# EAGLE board SyncScan Standalone MK3 PTH (EAGLE 6.2)
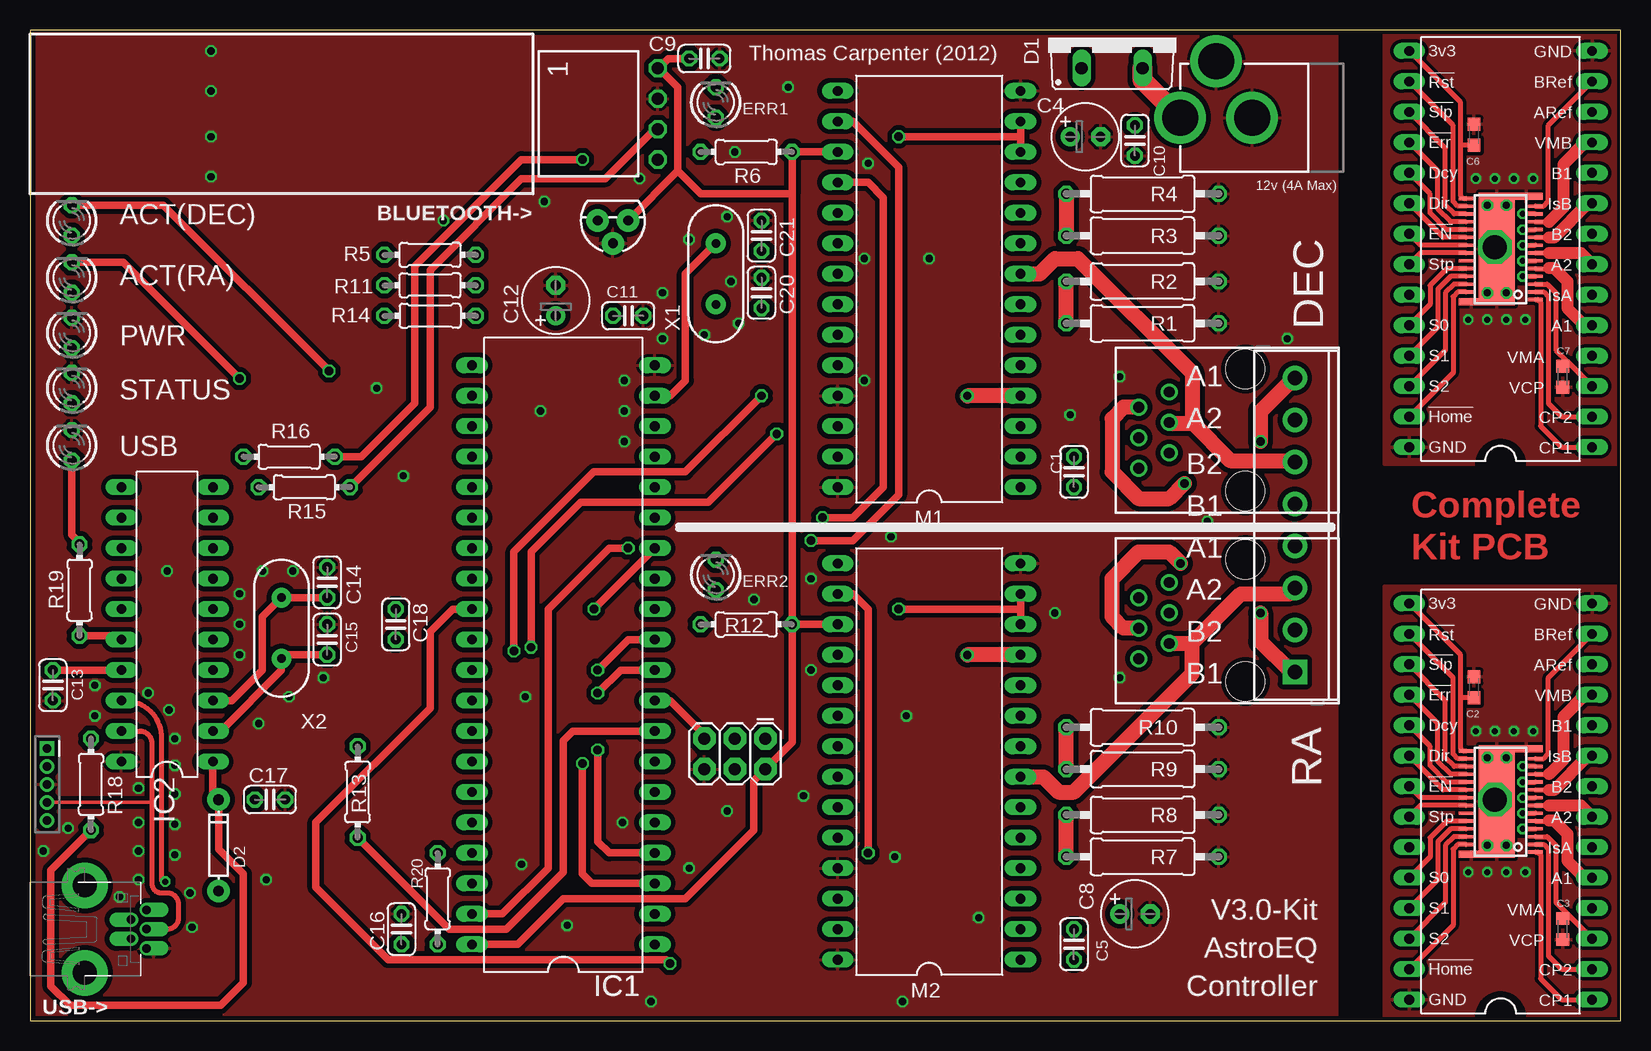
[diagram p0: board, top side]
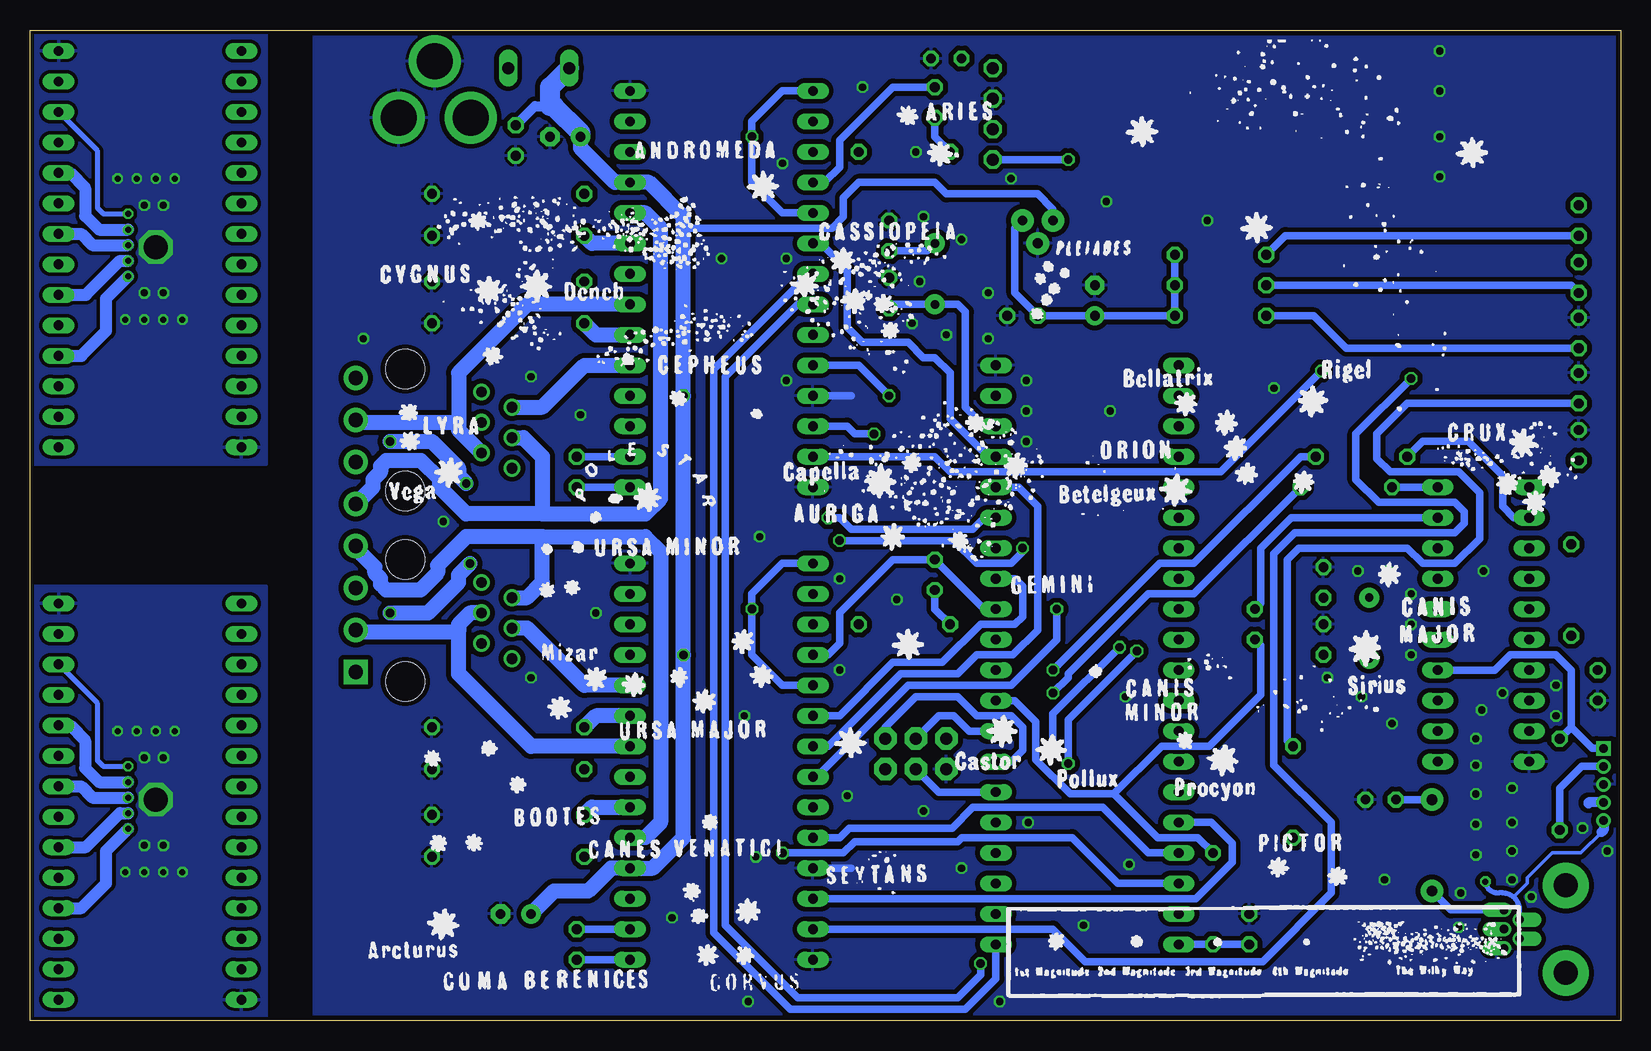
[diagram p1: board, bottom side, seen from below]

Size 132.56 x 82.55 mm. Coordinates in mm from the lower left corner, seen from the top.
Outline: 0,82.55 0,0 132.56,0 132.56,82.55 0,82.55
Copper layers (1*16): Top 0.035mm / dielectric 1.5mm / Bottom 0.035mm
Design rules: minimum track width 0.2mm, minimum drill 0.49mm, track to track 0.2mm, track to pad 0.2mm, pad to pad 0.2mm, via to via 0.2mm, smd to smd 0mil, copper to edge 10mil, drill to drill 0.2mm, minimum pad ring 10mil, minimum via ring 7mil, stop-mask expansion 0.125mm, vias tented up to drill 0mil, thermal gap 10mil
Net classes: 1 power: width 0.61 mm, drill 0.711 mm, clearance 0.203 mm; 2 gnd: width 0.305 mm, drill 0.711 mm, clearance 0.203 mm; 3 usbvcc: width 0.508 mm, drill 0.711 mm, clearance 0.203 mm
tRestrict: area 120.9,0.3 to 124.2,2; area 120.9,46.4 to 124.2,48

## Footprints (pad centres in the part's own frame; a part is rotated, then mirrored left to right if it is on the bottom)
LED3MM = drill 0.813 octagon: A -1.27,0; K 1.27,0
SSW-104-02-S-S-RA = drill 1 pad 1.5 octagon: 1 -3.81,1.524; 2 -1.27,1.524; 3 1.27,1.524; 4 3.81,1.524
C025-024X044 = drill 0.813 octagon: 1 -1.27,0; 2 1.27,0
C0603K = smd 1.05 x 1.08: 1 -0.875,0; 2 0.875,0
E2,5-6 = drill 0.813 pad 1.6: + -1.27,0 | drill 0.813 pad 1.6 octagon: - 1.27,0
TO220ACS = drill 1.016 long: A 2.54,-2.54; C -2.54,-2.54
DIODE-1N4148 = drill 0.9 pad 1.88: A -3.81,0; C 3.81,0
RJ11-NO_SHIELD = drill 0.9 pad 1.4: 1 -3.175,8.89; 2 -1.905,6.35; 3 -0.635,8.89; 4 0.635,6.35; 5 1.905,8.89; 6 3.175,6.35 | hole 3.251: -5.08,0; 5.08,0
DIL40 = drill 0.813 long: 1 -24.13,-7.62; 2 -21.59,-7.62; 3 -19.05,-7.62; 4 -16.51,-7.62; 5 -13.97,-7.62; 6 -11.43,-7.62; 7 -8.89,-7.62; 8 -6.35,-7.62; 9 -3.81,-7.62; 10 -1.27,-7.62; 11 1.27,-7.62; 12 3.81,-7.62; 13 6.35,-7.62; 14 8.89,-7.62; 15 11.43,-7.62; 16 13.97,-7.62; 17 16.51,-7.62; 18 19.05,-7.62; 19 21.59,-7.62; 20 24.13,-7.62; 21 24.13,7.62; 22 21.59,7.62; 23 19.05,7.62; 24 16.51,7.62; 25 13.97,7.62; 26 11.43,7.62; 27 8.89,7.62; 28 6.35,7.62; 29 3.81,7.62; 30 1.27,7.62; 31 -1.27,7.62; 32 -3.81,7.62; 33 -6.35,7.62; 34 -8.89,7.62; 35 -11.43,7.62; 36 -13.97,7.62; 37 -16.51,7.62; 38 -19.05,7.62; 39 -21.59,7.62; 40 -24.13,7.62
DIL20 = drill 0.813 long: 1 -3.81,11.43; 2 -3.81,8.89; 3 -3.81,6.35; 4 -3.81,3.81; 5 -3.81,1.27; 6 -3.81,-1.27; 7 -3.81,-3.81; 8 -3.81,-6.35; 9 -3.81,-8.89; 10 -3.81,-11.43; 11 3.81,-11.43; 12 3.81,-8.89; 13 3.81,-6.35; 14 3.81,-3.81; 15 3.81,-1.27; 16 3.81,1.27; 17 3.81,3.81; 18 3.81,6.35; 19 3.81,8.89; 20 3.81,11.43
TO-92 = drill 0.813 pad 1.88: 1 -1.27,0; 2 0,1.905; 3 1.27,0
DIL28-6 = drill 0.813 long: 1 -16.51,-7.62; 2 -13.97,-7.62; 3 -11.43,-7.62; 4 -8.89,-7.62; 5 -6.35,-7.62; 6 -3.81,-7.62; 7 -1.27,-7.62; 8 1.27,-7.62; 9 3.81,-7.62; 10 6.35,-7.62; 11 8.89,-7.62; 12 11.43,-7.62; 13 13.97,-7.62; 14 16.51,-7.62; 15 16.51,7.62; 16 13.97,7.62; 17 11.43,7.62; 18 8.89,7.62; 19 6.35,7.62; 20 3.81,7.62; 21 1.27,7.62; 22 -1.27,7.62; 23 -3.81,7.62; 24 -6.35,7.62; 25 -8.89,7.62; 26 -11.43,7.62; 27 -13.97,7.62; 28 -16.51,7.62
PIC-ICSP-MINI = drill 0.7 square: 1 -3,0 | drill 0.7: 2 -1.5,0; 3 0,0; 4 1.5,0; 5 3,0
POWER_JACK_PTH = drill 2.997 pad 4.318: GND 0,7.7; GNDBREAK 4.7,10.7; PWR 0,13.7
DIL28-6' = drill 0.813 pad 1.2 long: 1 -16.51,-7.62; 2 -13.97,-7.62; 3 -11.43,-7.62; 4 -8.89,-7.62; 5 -6.35,-7.62; 6 -3.81,-7.62; 7 -1.27,-7.62; 8 1.27,-7.62; 9 3.81,-7.62; 10 6.35,-7.62; 11 8.89,-7.62; 12 11.43,-7.62; 13 13.97,-7.62; 14 16.51,-7.62; 15 16.51,7.62; 16 13.97,7.62; 17 11.43,7.62; 18 8.89,7.62; 19 6.35,7.62; 20 3.81,7.62; 21 1.27,7.62; 22 -1.27,7.62; 23 -3.81,7.62; 24 -6.35,7.62; 25 -8.89,7.62; 26 -11.43,7.62; 27 -13.97,7.62; 28 -16.51,7.62
HTSSOP28PWP = smd 0.27 x 1.2: 1 -4.21,-2.9; 2 -3.575,-2.9; 3 -2.925,-2.9; 4 -2.275,-2.9; 5 -1.625,-2.9; 6 -0.975,-2.9; 7 -0.325,-2.9; 8 0.325,-2.9; 9 0.975,-2.9; 10 1.625,-2.9; 11 2.275,-2.9; 12 2.925,-2.9; 13 3.575,-2.9; 15 4.21,2.9; 16 3.575,2.9; 17 2.925,2.9; 18 2.275,2.9; 19 1.625,2.9; 20 0.975,2.9; 21 0.325,2.9; 22 -0.325,2.9; 23 -0.975,2.9; 24 -1.625,2.9; 25 -2.275,2.9; 26 -2.925,2.9; 27 -3.575,2.9 | smd 0.61 x 2.735: 14 4.395,-2.132 | smd 0.61 x 2.1: 28 -4.395,2.45 | smd 9.4 x 3: EXP 0,0.318
SCREWTERMINAL-3.5MM-8 = drill 1.2 pad 2.032 square: 1 0,0 | drill 1.2 pad 2.032: 2 3.5,0; 3 7,0; 4 10.5,0; 5 14,0; 6 17.5,0; 7 21,0; 8 24.5,0
2X3 = drill 1.016 pad 1.88 octagon: 1 0,0; 2 0,2.54; 3 2.54,0; 4 2.54,2.54; 5 5.08,0; 6 5.08,2.54
0309/12 = drill 0.813 octagon: 1 -6.35,0; 2 6.35,0
0204/7 = drill 0.813 octagon: 1 -3.81,0; 2 3.81,0
USB-MINIB-THM-MOLEX = drill 0.7 offset: D+ 0,9.72; D- -0.8,8.42; GND 1.6,9.72; ID 0.8,8.42; VBUS -1.6,9.72 | drill 2 pad 3.81: GND1 -3.65,4.57; GND4 3.65,4.57
HC49US = drill 0.7 pad 1.651: 1 -2.54,0; 2 2.54,0

## Placement (x,y rotation side)
ACT(DEC)  Green  [LED3MM]  3.49,66.67 90 top
ACT(RA)  Green  [LED3MM]  3.49,61.91 90 top
BLUETOOTH->  http://www.ebay.co.uk/itm/250991624201  [SSW-104-02-S-S-RA]  50.8,75.56 270 top
C1  10n  [C025-024X044]  87,45.72 90 top
C2  100n  [C0603K]  120.33,27.78 90 top
C3  100n  [C0603K]  127.71,7.62 90 top
C4  100u  [E2,5-6]  87.95,73.66 0 top
C5  10n  [C025-024X044]  87,6.35 90 top
C6  100n  [C0603K]  120.33,73.82 90 top
C7  100n  [C0603K]  127.71,53.66 90 top
C8  100u  [E2,5-6]  92.08,8.89 0 top
C9  100n  [C025-024X044]  56.2,80.17 0 top
C10  100n  [C025-024X044]  92.08,73.34 270 top
C11  100n  [C025-024X044]  49.85,58.74 0 top
C12  100u  [E2,5-6]  43.81,60.01 90 top
C13  470n  [C025-024X044]  1.91,27.94 90 top
C14  22p  [C025-024X044]  24.77,36.51 90 top
C15  22p  [C025-024X044]  24.77,31.75 90 top
C16  100n  [C025-024X044]  30.96,7.62 90 top
C17  100n  [C025-024X044]  20,18.41 0 top
C18  100n  [C025-024X044]  30.48,33.02 270 top
C20  22p  [C025-024X044]  60.96,60.64 90 top
C21  22p  [C025-024X044]  60.96,65.41 90 top
D1  C3D06065A  [TO220ACS]  90.17,81.92 0 top
D2  1N4148  [DIODE-1N4148]  15.72,14.61 90 top
DEC  RJ11-4X  [RJ11-NO_SHIELD]  101.28,49.21 90 top
ERR1  Red  [LED3MM]  57.15,76.52 90 top
ERR2  Red  [LED3MM]  57.15,37.15 90 top
IC1  ATMEGA162-16PU  [DIL40]  44.45,30.48 90 top
IC2  PIC18F14K50-I/P  [DIL20]  11.43,33.02 180 top
IC3  78L05  [TO-92]  48.58,66.67 180 top
IC4  Footprint  [DIL28-6]  122.56,18.26 90 top
IC5  Footprint  [DIL28-6]  122.56,64.29 90 top
ICSP  PIC-ICSP-MINI  [PIC-ICSP-MINI]  1.43,19.68 270 top
J1  POWER_JACKPTH  [POWER_JACK_PTH]  109.54,75.25 90 top
M1  DRV8824BREAKOUT  [DIL28-6']  74.93,60.96 90 top
M1A  DRV8824PWP  [HTSSOP28PWP]  122.56,64.29 90 top
M2  DRV8824BREAKOUT  [DIL28-6']  74.93,21.59 90 top
M2A  DRV8824PWP  [HTSSOP28PWP]  122.56,18.26 90 top
MOTOR2  Screw Terminal  [SCREWTERMINAL-3.5MM-8]  105.41,29.05 90 top
PROG  AVR_PRG  [2X3]  61.28,23.5 180 top
PWR  Red  [LED3MM]  3.49,57.31 90 top
R1  1.5R  [0309/12]  92.71,58.1 180 top
R2  1.5R  [0309/12]  92.71,61.59 180 top
R3  1.5R  [0309/12]  92.71,65.41 180 top
R4  1.5R  [0309/12]  92.71,68.9 180 top
R5  1k  [0204/7]  33.34,63.82 0 top
R6  1k  [0204/7]  59.69,72.39 0 top
R7  1.5R  [0309/12]  92.71,13.65 180 top
R8  1.5R  [0309/12]  92.71,17.14 180 top
R9  1.5R  [0309/12]  92.71,20.95 180 top
R10  1.5R  [0309/12]  92.71,24.45 180 top
R11  1k  [0204/7]  33.34,61.28 0 top
R12  1k  [0204/7]  59.69,33.02 0 top
R13  1k  [0204/7]  27.3,19.05 90 top
R14  1k  [0204/7]  33.34,58.74 180 top
R15  1k  [0204/7]  22.86,44.45 180 top
R16  1k  [0204/7]  21.59,46.99 180 top
R18  10k  [0204/7]  5.08,19.68 270 top
R19  1k  [0204/7]  4.13,35.88 270 top
R20  10k  [0204/7]  33.97,10.16 270 top
RA  RJ11-4X  [RJ11-NO_SHIELD]  101.28,33.34 90 top
STATUS  Green  [LED3MM]  3.49,52.7 90 top
USB  Green  [LED3MM]  3.49,47.94 90 top
USB->  Molex 565790519  [USB-MINIB-THM-MOLEX]  0,7.62 270 top
X1  16MHz  [HC49US]  57.15,62.23 90 top
X2  12MHz  [HC49US]  20.95,32.7 90 top

## Library data of the parts
ACT(DEC) ACT(RA) STATUS USB = led; MF: KINGBRIGHT; MPN: L-424GDT; OC_FARNELL: 1142496
BLUETOOTH-> = con-samtec; OC_FARNELL: unknown; OC_NEWARK: 11P9385
C1 C5 = resistor; MF: AVX; MPN: SR151C103KAR; OC_FARNELL: 1100380
C2 C3 C6 C7 = resistor; MF: KEMET; MPN: C0603C104K4RACTU; OC_FARNELL: 1414610
C4 C8 C12 = resistor; MF: MULTICOMP; MPN: MCGPR25V107M6.3X11; OC_FARNELL: 9451188
C9-C11 C16-C18 = resistor; MF: AVX; MPN: SR205C104KAR; OC_FARNELL: 1100367
C13 = rcl; MF: KEMET; MPN: C320C474M5U5TA; OC_FARNELL: 1457660
C14 C15 C20 C21 = rcl; MF: AVX; MPN: SR151A220JAR; OC_FARNELL: 1100369
D1 = diode; MF: CREE; MPN: C3D06065A; OC_FARNELL: 1864928
D2 = SparkFun; MF: MULTICOMP; MPN: 1N4148.; OC_FARNELL: 9565124
DEC RA = con-tycoelectronics; MF: MH CONNECTORS; MPN: MHRJJ64NFRA; OC_FARNELL: 3938347; OC_NEWARK: 19R7022
ERR1 ERR2 PWR = led; MF: KINGBRIGHT; MPN: L-424HDT; OC_FARNELL: 1142499
IC1 = atmel; MF: ATMEL; MPN: ATMEGA162-16PU; OC_FARNELL: 9171169
IC2 = microchip; MF: MICROCHIP; MPN: PIC18F14K50-I/P; OC_FARNELL: 1648501; OC_NEWARK: 77M3103; PACKAGE: DIP-20; SUPPLIER: Microchip
IC3 = SparkFun; MF: FAIRCHILD SEMICONDUCTOR; MPN: LM78L05ACZX; OC_FARNELL: 1467367
IC4 IC5 = ic-package; MF: MULTICOMP; MPN: MC34735; OC_FARNELL: 1593421
ICSP = SparkFun; OC_FARNELL: unknown
J1 = SparkFun; MF: MULTICOMP; MPN: MJ-179PH; OC_FARNELL: 1737246
M1 M2 = texas; MF: MULTICOMP; MPN: MC-2227-28-06-F1; OC_FARNELL: 1182591
M1A M2A = texas; MF: TEXAS INSTRUMENTS; MPN: DRV8824PWP; OC_FARNELL: 1815786
MOTOR2 = SparkFun; MF: LUMBERG; MPN: KRMC 08; OC_FARNELL: 1217307
PROG = SparkFun; MF: TE CONNECTIVITY / AMP; MPN: 826632-3; OC_FARNELL: 3418492
R1-R4 R7-R10 = resistor; MF: WELWYN; MPN: MFP1-1R5 JI; OC_FARNELL: 1565361
R5 R6 R11 R12 = resistor; MF: MULTICOMP; MPN: MF12 1K; OC_FARNELL: 9342400
R13 R14 R19 = rcl; MF: MULTICOMP; MPN: MF12 1K; OC_FARNELL: 9342400
R15 R16 = SmartPrj; MF: MULTICOMP; MPN: MF12 1K; OC_FARNELL: 9342400
R18 R20 = rcl; MF: MULTICOMP; MPN: MF12 10K; OC_FARNELL: 9342419
USB-> = adafruit; MF: MOLEX; MPN: 565790519; OC_FARNELL: 1125347
X1 = SparkFun; MF: TXC; MPN: 9B-16.000MEEJ-B; OC_FARNELL: 1842217
X2 = SparkFun; MF: TXC; MPN: 9B-12.000MAAJ-B; OC_FARNELL: 1842203

## Nets
3.3V-1: M1.12 M1.13 M1.15 M1.19
3.3V-2: M2.12 M2.13 M2.15 M2.19
!EN: IC4.21 M2A.21
!EN1: IC5.21 M1A.21
!EN-1: IC1.1 M1.21
!EN-2: IC1.16 M2.21
!ERR: IC4.18 M2A.18
!ERR1: IC5.18 M1A.18
!ERR-1: ERR1.K IC1.15 M1.18
!ERR-2: ERR2.K IC1.12 M2.18
!HOME: IC4.27 M2A.27
!HOME1: IC5.27 M1A.27
!HOME-1: ACT(DEC).K M1.27
!HOME-2: ACT(RA).K M2.27
!RES: IC4.16 M2A.16
!RES1: IC5.16 M1A.16
!RST-1: IC1.39 M1.16
!RST-2: IC1.38 M2.16
!SLP: IC4.17 M2A.17
!SLP1: IC5.17 M1A.17
+5V: BLUETOOTH->.1 C9.1 C11.1 C12.+ C16.1 IC1.40 IC3.1 M1.17 M2.17 PROG.2 R5.2 R6.2 R11.2 R12.2 R14.1 R20.2
A1-1: DEC.5 M1.5 MOTOR2.8
A1-2: M2.5 MOTOR2.4 RA.5
A2-1: DEC.2 M1.7 MOTOR2.7
A2-2: M2.7 MOTOR2.3 RA.2
AOUT1: IC4.5 M2A.5
AOUT2: IC4.7 M2A.7
AOUT3: IC5.5 M1A.5
AOUT4: IC5.7 M1A.7
AVREF: IC4.12 M2A.12
AVREF1: IC5.12 M1A.12
AVROSC1: C21.1 IC1.19 X1.2
AVROSC2: C20.1 IC1.18 X1.1
B1-1: DEC.3 M1.10 MOTOR2.5
B1-2: M2.10 MOTOR2.1 RA.3
B2-1: DEC.4 M1.8 MOTOR2.6
B2-2: M2.8 MOTOR2.2 RA.4
BOUT1: IC4.10 M2A.10
BOUT2: IC4.8 M2A.8
BOUT3: IC5.8 M1A.8
BOUT4: IC5.10 M1A.10
BVREF: IC4.13 M2A.13
BVREF1: IC5.13 M1A.13
CP1: IC4.1 M2A.1
CP1-1: C1.1 M1.1
CP1-2: C5.1 M2.1
CP2: IC4.2 M2A.2
CP2-1: C1.2 M1.2
CP2-2: C5.2 M2.2
CP3: IC5.1 M1A.1
CP4: IC5.2 M1A.2
D+: IC2.19 ICSP.4 USB->.D+
D-: IC2.18 ICSP.5 USB->.D-
DECAY: IC4.19 M2A.19
DECAY1: IC5.19 M1A.19
DIR: IC4.20 M2A.20
DIR1: IC5.20 M1A.20
DIR-1: IC1.17 M1.20
DIR-2: IC1.13 M2.20
GND: BLUETOOTH->.2 C4.- C8.- C9.2 C10.2 C11.2 C12.- C13.1 C14.2 C15.2 C16.2 C17.2 C20.2 C21.2 IC1.20 IC2.20 IC3.2 ICSP.3 J1.GND J1.GNDBREAK M1.14 M1.25 M1.28 M2.14 M2.25 M2.28 PROG.6 PWR.K R1.1 R2.1 R3.1 R4.1 R7.1 R8.1 R9.1 R10.1 STATUS.K USB->.GND USB.K
GND1: C6.2 C7.1 IC5.14 IC5.28 M1A.14 M1A.28 M1A.EXP
GND2: C2.2 C3.1 IC4.14 IC4.28 M2A.14 M2A.28 M2A.EXP
ISENA: IC4.6 M2A.6
ISENA1: IC5.6 M1A.6
ISENA-1: M1.6 R1.2 R2.2
ISENA-2: M2.6 R7.2 R8.2
ISENB: IC4.9 M2A.9
ISENB1: IC5.9 M1A.9
ISENB-1: M1.9 R3.2 R4.2
ISENB-2: M2.9 R9.2 R10.2
LED1: ERR1.A R6.1
LED2: ACT(DEC).A R5.1
LED3: ERR2.A R12.1
LED4: ACT(RA).A R11.1
M0-1: IC1.3 M1.24
M0-2: IC1.37 M2.24
M2-1: IC1.4 M1.26
M2-2: IC1.36 M2.26
MCLR: IC2.4 ICSP.1 R18.1
MISO: IC1.7 PROG.1
MODE0: IC4.24 M2A.24
MODE1: IC4.25 M2A.25
MODE2: IC4.26 M2A.26
MODE3: IC5.24 M1A.24
MODE4: IC5.25 M1A.25
MODE5: IC5.26 M1A.26
MOSI: IC1.6 PROG.4
N$1: C18.1 IC2.9
PWRLED: PWR.A R14.2
RESET: C18.2 IC1.9 PROG.5 R20.1
RX(BTH): BLUETOOTH->.4 IC1.11 R16.1
RX(USB): IC2.12 R16.2
SCLK: IC1.8 PROG.3 R13.1
STATLED: R13.2 STATUS.A
STEP: IC4.22 M2A.22
STEP1: IC5.22 M1A.22
STEP-1: IC1.29 M1.22
STEP-2: IC1.14 M2.22
TX(BTH): BLUETOOTH->.3 IC1.10 R15.1
TX(USB): IC2.10 R15.2
USBLED: R19.1 USB.A
USBOSC1: C15.1 IC2.2 X2.1
USBOSC2: C14.1 IC2.3 X2.2
USBSTAT: IC2.16 R19.2
V3P1: C6.1 IC5.15 M1A.15
V3P3: C2.1 IC4.15 M2A.15
V+: C4.+ C8.+ C10.1 D1.C IC3.3 M1.4 M1.11 M2.4 M2.11
VBUS: D2.A USB->.VBUS
VCP: C3.2 IC4.3 M2A.3
VCP1: C7.2 IC5.3 M1A.3
VIN: D1.A J1.PWR
VMA: IC4.4 M2A.4
VMA1: IC5.4 M1A.4
VMB: IC4.11 M2A.11
VMB1: IC5.11 M1A.11
VPIC: C17.1 D2.C IC2.1 ICSP.2 R18.2
VUSB: C13.2 IC2.17

## Tracks (layer width: path | path; a pad name or v marks a point on that pad's centre or on a via)
3.3V-1  (via drill 0.7)
  Top 0.61: 82.55,73.66 M1.12 | M1.13 82.55,73.66 | 82.55,73.66 v72.39,73.66
  Bottom 0.61: M1.15 69.85,77.47 72.39,74.93 v72.39,73.66 72.39,69.85 69.85,67.31 M1.19
3.3V-2  (via drill 0.7)
  Top 0.61: M2.13 82.55,34.29 | 82.55,34.29 v72.39,34.29 | M2.12 82.55,34.29
  Bottom 0.61: M2.15 69.85,38.1 72.39,35.56 v72.39,34.29 72.39,30.48 69.85,27.94 M2.19
!EN
  Top 0.406: M2A.21 115.88,18.58 IC4.21
!EN1
  Top 0.406: M1A.21 115.88,64.62 IC5.21
!EN-1
  Bottom 0.61: M1.21 67.63,62.23 75.56,54.29 75.56,7.3 69.22,0.95 54.61,0.95 52.07,3.49 IC1.1
!EN-2
  Bottom 0.61: M2.21 66.04,22.86 60.01,28.89 55.24,28.89 53.66,30.48 50.64,30.48 48.58,32.54 48.58,42.86 50.16,44.45 IC1.16
!ERR
  Top 0.406: M2A.18 118.38,20.53 117.32,21.59 117.32,24.77 IC4.18
!ERR1
  Top 0.406: M1A.18 118.38,66.57 117.32,67.63 117.32,70.8 IC5.18
!ERR-1  (via drill 0.7)
  Top 0.61: M1.18 69.85,69.85 71.12,68.58 71.12,44.45 68.58,41.91 v66.04,41.91
  Bottom 0.61: M1.18 66.36,69.85 65.09,71.12 65.09,73.34 60.64,77.79 ERR1.K | v66.04,41.91 65.09,41.91 64.14,40.96 53.98,40.96 53.02,41.91 IC1.15
!ERR-2
  Bottom 0.61: M2.18 66.04,30.48 65.09,31.43 65.09,33.97 60.64,38.42 ERR2.K 53.02,34.29 IC1.12
!HOME
  Top 0.406: M2A.27 118.98,14.68 118.59,14.29 118.59,7.94 IC4.27
!HOME1
  Top 0.406: M1A.27 118.98,60.72 118.59,60.33 118.59,53.98 IC5.27
!HOME-1  (via drill 0.7)
  Top 0.61: ACT(DEC).K 11.11,67.94 v24.92,54.13
  Bottom 0.61: M1.27 57.15,46.99 55.88,45.72 33.34,45.72 v24.92,54.13
!HOME-2  (via drill 0.7)
  Top 0.61: ACT(RA).K 7.78,63.18 v17.46,53.5
  Bottom 0.61: M2.27 47.31,7.62 44.61,4.92 29.84,4.92 24.13,10.64 24.13,16.51 28.89,21.27 28.89,38.89 27.15,40.64 13.81,40.64 13.02,41.43 13.02,42.39 13.81,43.18 20.16,43.18 22.07,45.09 22.07,48.9 v17.46,53.5
!RES
  Top 0.406: M2A.16 118.98,21.83 118.59,22.23 118.59,28.57 IC4.16
!RES1
  Top 0.406: M1A.16 118.98,67.87 118.59,68.26 118.59,74.61 IC5.16
!RST-1  (via drill 0.7)
  Top 0.61: M1.16 68.58,74.93 72.39,71.12 72.39,43.81 68.58,40.01 v65.09,40.01 | IC1.39 39.37,8.89 43.18,12.7 43.18,34.29 48.26,39.37 v49.85,39.37
  Bottom 0.61: v65.09,40.01 55.56,40.01 53.66,38.1 50.8,38.1 49.85,39.05 v49.85,39.37
!RST-2  (via drill 0.7)
  Top 0.61: M2.16 68.58,35.56 69.85,34.29 v69.85,13.97
  Bottom 0.61: v69.85,13.97 64.77,13.97 63.82,14.92 55.24,14.92 54.93,15.24 45.72,15.24 41.91,11.43 IC1.38
!SLP
  Top 0.406: M2A.17 118.68,21.18 117.95,21.91 117.95,26.67 IC4.17
!SLP1
  Top 0.406: M1A.17 118.68,67.22 117.95,67.94 117.95,72.71 IC5.17
+5V
  Top 0.61: R12.2 63.5,68.9 | M1.17 R6.2 63.5,68.9 | M2.17 R12.2 | R12.2 63.5,23.18 PROG.2 60.33,20 60.33,15.88 54.61,10.16 44.45,10.16 40.64,6.35 IC1.40 | IC3.1 53.98,70.8 | 53.98,70.8 55.88,68.9 63.5,68.9 | 53.98,70.8 53.98,77.79 52.39,79.38 | C9.1 53.18,80.17 52.39,79.38 | 52.39,79.38 BLUETOOTH->.1
  Bottom 0.61: IC1.40 R20.2 C16.1 | IC3.1 50.48,66.04 50.48,60.64 C11.1 C12.+ R14.1 R11.2 R5.2
A1-1  (via drill 0.7)
  Top 1.27: MOTOR2.8 105.41,53.34 105.09,53.34 102.55,50.8 v102.55,48.26 | DEC.5 91.12,51.12 90.17,50.16 90.17,45.72 92.39,43.5 94.93,43.5 v96.2,44.77
  Bottom 1.27: M1.5 86.36,54.61 89.85,51.12 DEC.5 | v102.55,48.26 99.06,48.26 96.84,46.04 96.84,45.4 v96.2,44.77
A1-2
  Bottom 1.27: 89.85,40.32 89.85,36.51 91.12,35.24 RA.5 | 89.85,40.32 81.28,40.32 80.01,39.05 80.01,16.51 81.28,15.24 M2.5 | 89.85,40.32 96.2,40.32 98.58,37.94 98.58,37.33 100.03,35.88 102.87,35.88 103.35,36.35 103.35,36.83 103.82,37.31 103.82,37.78 105.41,39.37 MOTOR2.4
A2-1
  Bottom 1.27: M1.7 91.12,59.69 96.84,53.98 96.84,49.85 | 96.84,49.85 96.84,49.21 DEC.2 | 96.84,49.85 105.41,49.85 105.45,49.89 105.45,50.01 MOTOR2.7
A2-2
  Top 1.27: M2.7 84.45,20.32 85.72,19.05 87,19.05 96.84,28.89 96.84,31.43 | 96.84,31.43 96.84,31.5 100.9,35.56 104.92,35.56 MOTOR2.3 | RA.2 96.84,31.43
AOUT1
  Top 0.406: 129.54,11.91 IC4.5 | M2A.5 126.56,16.63 126.59,16.66
  Top 1.016: 129.54,11.91 128.11,13.34 128.11,15.56 127,16.67 126.99,16.66 126.59,16.66
AOUT2
  Top 0.406: M2A.7 126.58,17.93 126.59,17.94
  Top 1.016: 126.59,17.94 129.23,17.94 129.23,17.93 IC4.7
AOUT3
  Top 0.406: 129.54,57.94 IC5.5 | M1A.5 126.56,62.67 126.59,62.7
  Top 1.016: 129.54,57.94 128.11,59.37 128.11,61.59 127.01,62.7 126.59,62.7
AOUT4
  Top 0.406: M1A.7 126.58,63.97 126.59,63.98
  Top 1.016: 126.59,63.98 129.23,63.98 129.23,63.97 IC5.7
AVREF  (via drill 0.5)
  Top 0.406: M2A.12 124.39,21.18 v124.38,21.19
  Bottom 0.406: IC4.12 126.92,26.43 126.92,21.67 126.43,21.18 124.39,21.18 v124.38,21.19
AVREF1  (via drill 0.5)
  Top 0.406: M1A.12 124.39,67.22 v124.38,67.23
  Bottom 0.406: IC5.12 126.92,72.47 126.92,67.71 126.43,67.22 124.39,67.22 v124.38,67.23
AVROSC1
  Top 0.61: IC1.19 53.34,52.07 54.61,53.34 54.61,62.23 X1.2
  Bottom 0.61: C21.1 57.78,64.14 X1.2
AVROSC2
  Bottom 0.61: IC1.18 53.02,49.53 54.61,51.12 54.61,59.05 55.24,59.69 X1.1 60.64,59.69 C20.1
B1-1
  Bottom 1.27: 89.85,42.23 89.85,46.99 91.44,48.58 DEC.3 | 89.85,42.23 81.28,42.23 80.01,43.5 80.01,66.04 81.28,67.31 M1.10 | 89.85,42.23 96.2,42.23 98.42,44.45 98.42,45.12 99.98,46.67 102.87,46.67 103.35,46.2 103.35,45.72 103.98,45.09 103.98,44.45 105.38,43.05 MOTOR2.5
B1-2  (via drill 0.7)
  Top 1.27: v95.89,38.1 94.93,39.05 92.39,39.05 90.17,36.83 90.17,33.66 91.12,32.7 RA.3 | v102.55,33.97 102.55,31.59 105.09,29.05 MOTOR2.1
  Bottom 1.27: M2.10 86.36,27.94 91.12,32.7 RA.3 | v102.55,33.97 99.38,33.97 96.84,36.51 96.84,37.15 v95.89,38.1
B2-1
  Top 1.27: M1.8 84.14,62.23 85.41,63.5 87.31,63.5 96.84,53.98 96.84,49.85 | 96.84,49.85 96.84,49.78 95,49.78 DEC.4 | 96.84,49.85 100.01,46.67 105.41,46.67 MOTOR2.6
B2-2
  Bottom 1.27: M2.8 90.81,22.86 96.84,28.89 96.84,32.38 | 96.84,32.38 105.24,32.38 MOTOR2.2 | RA.4 95.89,33.97 96.84,33.02 96.84,32.38
BOUT1  (via drill 0.5)
  Top 0.406: v124.38,19.88 M2A.10
  Bottom 1.016: IC4.10 129.22,24.61 127.95,23.34 127.95,21.03 126.8,19.88 v124.39,19.88 v124.38,19.88
BOUT2  (via drill 0.5)
  Top 0.406: v124.38,18.58 M2A.8
  Bottom 1.016: IC4.8 128.31,19.53 127.36,18.58 v124.38,18.58
BOUT3  (via drill 0.5)
  Top 0.406: v124.38,64.62 M1A.8
  Bottom 1.016: IC5.8 128.31,65.56 127.36,64.62 v124.38,64.62
BOUT4  (via drill 0.5)
  Top 0.406: v124.38,65.91 v124.38,65.92 M1A.10
  Bottom 1.016: IC5.10 129.22,70.64 127.95,69.37 127.95,67.07 126.8,65.92 v124.39,65.92 v124.38,65.91
BVREF
  Top 0.406: M2A.13 126.13,21.83 126.52,22.23 126.52,28.57 IC4.13
BVREF1
  Top 0.406: M1A.13 126.13,67.87 126.52,68.26 126.52,74.61 IC5.13
CP1
  Top 0.406: M2A.1 125.65,14.05 125.89,13.81 125.89,3.49 127.64,1.75 IC4.1
CP1-1
  Bottom 0.61: C1.1 M1.1
CP1-2
  Bottom 0.61: C5.1 M2.1
CP2
  Top 0.406: M2A.2 126.13,14.68 126.52,14.29 126.52,5.4 127.64,4.29 IC4.2
CP2-1
  Bottom 0.61: C1.2 M1.2
CP2-2
  Bottom 0.61: C5.2 M2.2
CP3
  Top 0.406: M1A.1 125.65,60.08 125.89,59.85 125.89,49.53 127.64,47.78 IC5.1
CP4
  Top 0.406: M1A.2 126.13,60.72 126.52,60.33 126.52,51.44 127.64,50.32 IC5.2
D+
  Top 0.279: ICSP.4 10.16,18.18 10.16,18.26
  Top 0.406: USB->.D+ 11.43,7.62 arc90 12.38,8.57 12.38,9.68 arc90 11.43,10.64 10.95,10.64 arc-90 10.16,11.43 10.16,18.26 10.16,23.02 arc90 9.21,24.13 IC2.19
  Bottom 0.813: ICSP.4 2.7,18.18 2.7,18.1
D-  (via drill 0.5)
  Top 0.406: IC2.18 7.94,26.67 arc-90 10.95,23.5 10.95,11.75 arc90 11.11,11.59 v11.27,11.59
  Bottom 0.279: 1.59,15.72 3.33,13.97 5.71,13.97 7.78,11.91 7.78,11.43 8.89,10.32 arc90 9.05,10.32 arc-46 9.84,10.64
  Bottom 0.406: USB->.D- 8.42,9.21 arc-90 9.84,10.64 10.16,10.64 arc90 v11.27,11.59
  Bottom 0.813: ICSP.5 1.43,15.88 1.59,15.72
DECAY
  Top 0.406: M2A.19 118.07,19.88 116.68,21.27 116.68,22.86 IC4.19
DECAY1
  Top 0.406: M1A.19 118.07,65.92 116.68,67.31 116.68,68.9 IC5.19
DIR
  Top 0.406: M2A.20 117.77,19.23 IC4.20
DIR1
  Top 0.406: M1A.20 117.77,65.27 IC5.20
DIR-1
  Bottom 0.61: IC1.17 52.7,46.99 55.88,50.16 55.88,53.98 57.15,55.24 58.1,55.24 59.37,56.52 63.18,56.52 64.45,57.78 64.45,62.55 66.67,64.77 M1.20
DIR-2
  Bottom 0.61: M2.20 65.09,25.4 60.64,29.84 56.52,29.84 53.34,33.02 50.48,33.02 49.85,33.66 49.85,36.2 50.48,36.83 IC1.13
GND  (via drill 0.6)
  Bottom 0.61: M1.25 64.14,52.07 | M2.25 64.14,12.7
  other vias: 58.1,17.46 41.27,26.99 42.55,50.8 21.59,26.99 19.37,37.47 90.81,53.66 17.46,35.56 49.53,50.8 49.53,48.26 49.53,53.34 34.45,66.67 15.08,70.33 15.08,80.8 15.08,77.47 65.09,36.83 63.18,77.79 52.7,56.83 58.1,66.99 72.07,13.65 24.45,28.57 21.91,37.47 56.2,57.15 17.46,30.48 17.46,33.02 31.11,45.4 19.68,11.75 19.05,24.77 60.33,35.08 40.96,13.02 11.43,37.47 73.03,25.4 51.75,1.59 58.74,72.39 5.4,27.94 50.8,70.17 15.08,73.66 72.71,1.59 28.89,52.7 42.86,68.26 12.06,18.89 9.05,14.13 12.06,13.81 12.06,23.5 9.05,11.75 13.49,7.78 7.46,10.32 12.06,21.27 13.34,10.64 11.59,25.88 52.7,60.64 58.42,61.59 79.06,8.57 5.4,25.4 54.93,65.09 12.06,16.35 9.05,16.51 86.68,50.48 85.41,33.97 9.84,27.3 49.37,16.51 44.77,7.94 98.11,41.59 64.45,18.73 104.78,56.83 90.81,28.57 71.75,40.32 69.53,53.34 65.09,29.21 59.05,58.1 69.85,71.44 69.53,63.5 74.93,63.5 1.11,14.13 9.05,19.37 3.17,16.03 54.93,12.7
  pour Bottom (isolate 0.406): 0,82.55 108.9,82.55 108.9,0 0,0
  pour Top (isolate 0.406, rank 2): 0,82.55 108.9,82.55 108.9,0 0,0
GND1  (via drill 0.5, 0.6, 2)
  other vias: 119.86,58.42 121.44,58.42 123.03,58.42 124.62,58.42 121.44,60.64 123.03,60.64 122.08,64.45 121.44,67.94 123.03,67.94 125.25,70.17 123.67,70.17 122.08,70.17 120.49,70.17
  pour Bottom (isolate 0.305): 112.87,46.35 132.56,46.35 132.56,82.55 112.87,82.55
  pour Top (isolate 0.305, rank 2): 112.87,46.35 132.56,46.35 132.56,82.55 112.87,82.55
GND2  (via drill 0.5, 0.6, 2)
  other vias: 122.08,18.41 121.44,14.61 123.03,14.61 119.86,12.38 121.44,12.38 123.03,12.38 124.62,12.38 120.49,24.13 122.08,24.13 123.67,24.13 125.25,24.13 121.44,21.91 123.03,21.91
  pour Top (isolate 0.305, rank 2): 112.87,0 132.56,0 132.56,36.2 112.87,36.2
  pour Bottom (isolate 0.305): 112.87,0 132.56,0 132.56,36.2 112.87,36.2
ISENA  (via drill 0.5)
  Top 0.406: v124.38,17.27 v124.38,17.28 M2A.6
  Bottom 1.016: IC4.6 127.89,14.45 125.06,17.28 v124.39,17.28 v124.38,17.27
ISENA1  (via drill 0.5)
  Top 0.406: v124.38,63.31 v124.38,63.32 M1A.6
  Bottom 1.016: IC5.6 127.89,60.48 125.06,63.32 v124.39,63.32 v124.38,63.31
ISENA-1
  Top 1.27: R1.2 R2.2
  Bottom 1.27: M1.6 85.41,57.15 R1.2
ISENA-2
  Top 1.27: R7.2 R8.2
  Bottom 1.27: M2.6 85.72,17.78 R8.2
ISENB
  Top 0.406: 129.86,22.07 IC4.9 | M2A.9 126.56,19.23 126.59,19.21
  Top 1.016: 129.86,22.07 127,19.21 126.59,19.21
ISENB1
  Top 0.406: 129.86,68.1 IC5.9 | M1A.9 126.56,65.27 126.59,65.25
  Top 1.016: 129.86,68.1 127,65.25 126.59,65.25
ISENB-1
  Top 1.27: R4.2 R3.2
  Bottom 1.27: M1.9 85.72,64.77 R3.2
ISENB-2
  Top 1.27: R9.2 R10.2
  Bottom 1.27: M2.9 85.41,25.4 R10.2
LED1
  Bottom 0.61: ERR1.A 57.15,73.66 R6.1
LED2
  Bottom 0.61: R5.1 27.94,65.41 ACT(DEC).A
LED3
  Bottom 0.61: ERR2.A 57.15,34.29 R12.1
LED4
  Bottom 0.61: R11.1 4.13,61.28 ACT(RA).A
M0-1  (via drill 0.7)
  Top 0.61: IC1.3 46.83,11.43 46.04,12.22 v46.04,21.43 | v40.32,30.8 40.32,39.05 46.99,45.72 54.61,45.72 v60.96,52.07
  Bottom 0.61: M1.24 63.5,54.61 v60.96,52.07 | v46.04,21.43 46.04,25.08 v40.32,30.8
M0-2
  Bottom 0.61: M2.24 65.09,15.24 64.29,16.03 55.72,16.03 53.98,17.78 43.18,17.78 39.37,13.97 IC1.37
M2-1  (via drill 0.7)
  Top 0.61: IC1.4 48.26,13.97 47.31,14.92 v47.31,22.54 | v41.75,31.11 41.75,39.05 45.88,43.18 56.52,43.18 v62.23,48.9
  Bottom 0.61: M1.26 64.45,49.53 63.82,48.9 v62.23,48.9 | v47.31,22.54 47.31,25.56 v41.75,31.11
M2-2
  Bottom 0.61: M2.26 35.4,10.16 32.38,13.18 32.38,14.76 34.13,16.51 IC1.36
MCLR
  Bottom 0.61: IC2.4 10.48,29.21 9.21,30.48 5.4,30.48 4.13,29.21 4.13,24.45 | 4.13,24.45 2.37,22.68 ICSP.1 | R18.1 4.13,24.45
MISO
  Bottom 0.61: IC1.7 50.8,21.59 49.85,22.54 49.85,24.45 50.8,25.4 53.66,25.4 55.24,26.99 58.74,26.99 61.28,24.45 PROG.1
MODE0
  Top 0.406: M2A.24 118.07,16.63 116.68,15.24 116.68,13.65 IC4.24
MODE1
  Top 0.406: M2A.25 118.38,15.98 117.32,14.92 117.32,11.75 IC4.25
MODE2
  Top 0.406: M2A.26 118.68,15.33 117.95,14.61 117.95,9.84 IC4.26
MODE3
  Top 0.406: M1A.24 118.07,62.67 116.68,61.28 116.68,59.69 IC5.24
MODE4
  Top 0.406: M1A.25 118.38,62.02 117.32,60.96 117.32,57.78 IC5.25
MODE5
  Top 0.406: M1A.26 118.68,61.37 117.95,60.64 117.95,55.88 IC5.26
MOSI
  Bottom 0.61: IC1.6 56.83,19.05 PROG.4
N$1
  Bottom 0.61: IC2.9 27.46,41.91 30,39.37 30,34.77 C18.1
PWRLED
  Bottom 0.61: PWR.A 22.86,56.04 25.56,58.74 R14.2
RESET
  Top 0.61: PROG.5 56.2,23.81 53.34,26.67 IC1.9
  Bottom 0.61: IC1.9 50.48,26.67 48.74,24.92 48.74,21.75 45.88,18.89 42.23,18.89 | 42.23,18.89 38.58,15.24 35.24,15.24 R20.1 | 42.23,18.89 38.26,22.86 34.29,22.86 30,27.15 30,31.27 C18.2
RX(BTH)  (via drill 0.7)
  Top 0.61: IC1.11 49.85,31.75 v47.31,29.21 | R16.1 27.62,46.99 32.07,51.44 32.07,62.87 40.96,71.75 v46.04,71.75
  Bottom 0.61: v47.31,29.21 38.42,38.1 35.56,38.1 26.67,46.99 R16.1 | BLUETOOTH->.4 v46.04,71.75
RX(USB)
  Bottom 0.61: IC2.12 8.89,41.91 9.84,42.86 9.84,45.4 12.7,48.26 16.51,48.26 R16.2
SCLK
  Top 0.61: IC1.8 45.24,24.13 44.45,23.34 44.45,12.38 39.69,7.62 34.92,7.62 R13.1
  Bottom 0.61: IC1.8 54.29,24.13 55.56,25.4 56.83,25.4 PROG.3
STATLED
  Bottom 0.61: STATUS.A 17.78,51.44 20.32,48.9 20.32,46.83 19.21,45.72 13.49,45.72 11.75,43.97 11.75,40.16 13.81,38.1 16.51,38.1 17.78,39.37 26.83,39.37 27.78,38.42 27.78,23.34 R13.2
STEP
  Top 0.406: M2A.22 115.88,17.93 IC4.22
STEP1
  Top 0.406: M1A.22 115.88,63.97 IC5.22
STEP-1  (via drill 0.7)
  Top 0.61: v53.34,4.76 53.02,5.08 29.84,5.08 23.81,11.11 23.81,16.51 33.34,26.04 33.34,32.38 35.24,34.29 IC1.29
  Bottom 0.61: M1.22 68.58,59.69 74.61,53.66 74.61,7.94 68.58,1.91 55.24,1.91 53.34,3.81 v53.34,4.76
STEP-2  (via drill 0.7)
  Top 0.61: IC1.14 v46.99,34.29
  Bottom 0.61: M2.22 66.99,20.32 59.37,27.94 50.8,27.94 46.99,31.75 v46.99,34.29
TX(BTH)  (via drill 0.7)
  Top 0.61: IC1.10 49.21,29.21 v47.31,27.3 | R15.1 33.34,51.12 33.34,62.55 40.96,70.17 47.94,70.17 52.07,74.3 BLUETOOTH->.3 52.39,74.3
  Bottom 0.61: v47.31,27.3 46.04,28.57 46.04,28.89 39.37,35.56 35.56,35.56 R15.1
TX(USB)
  Bottom 0.61: IC2.10 R15.2
USBLED
  Top 0.61: R19.1 4.13,39.85 3.49,40.48 USB.A
USBOSC1
  Top 0.61: IC2.2 15.88,24.13 20.95,29.21 X2.1 21.27,30.48 C15.1
USBOSC2
  Top 0.61: IC2.3 16.83,26.67 19.37,29.21 19.37,33.66 X2.2 C14.1
USBSTAT
  Top 0.61: IC2.16 7.3,31.75 6.99,32.07 R19.2
V3P1
  Top 0.406: M1A.15 119.46,68.5 119.22,68.74 119.22,72.94 | IC5.15 119.22,76.52 119.22,73.66 119.22,72.94 | C6.1 119.22,72.94
V3P3
  Top 0.406: M2A.15 119.46,22.47 119.22,22.7 119.22,26.91 | IC4.15 119.22,30.48 119.22,27.94 119.22,26.91 | C2.1 119.22,26.91
V+  (via drill 0.7)
  Top 1.27: M1.4 v78.11,52.07 | M2.11 v78.11,30.48
  Bottom 0.61: IC3.3 47.31,67.63 48.58,68.9 56.2,68.9 57.15,69.85 63.5,69.85 64.77,68.58 64.77,66.99 65.72,66.04 78.11,66.04
  Bottom 0.813: C10.1 90.49,76.2 89.22,76.2
  Bottom 1.27: C4.+ 86.68,72.71 83.82,69.85 M1.11 80.96,69.85 78.11,66.99 78.11,66.04 v78.11,52.07 v78.11,30.48 78.11,15.24 80.64,12.7 M2.4 84.14,12.7 86.04,10.79 88.9,10.79 C8.+
  Bottom 1.676: C4.+ 86.68,73.98 88.9,76.2 89.22,76.2 89.22,77.79 D1.C
VBUS
  Bottom 0.61: USB->.VBUS 14.14,9.22 D2.A
VCP
  Top 0.305: 128.09,8.49 C3.2 | 128.09,8.91 128.09,8.49 | 128.09,8.49 C3.2
  Top 0.406: M2A.3 126.43,15.33 127.16,14.61 127.16,9.84 128.09,8.91 IC4.3
VCP1
  Top 0.305: 128.09,54.53 C7.2 | 128.09,54.95 128.09,54.53 | 128.09,54.53 C7.2
  Top 0.406: M1A.3 126.43,61.37 127.16,60.64 127.16,55.88 128.09,54.95 IC5.3
VIN
  Top 1.676: J1.PWR 92.71,78.38 D1.A
VMA  (via drill 0.5)
  Top 0.406: v124.38,15.98 M2A.4
  Bottom 1.016: IC4.4 128.27,9.37 126.21,11.43 126.21,14.15 v124.38,15.98
VMA1  (via drill 0.5 pad 0.81)
  Top 0.406: v124.38,62.01 v124.38,62.02 M1A.4
  Bottom 1.016: IC5.4 128.27,55.4 126.21,57.47 126.21,60.19 v124.38,62.01
VMB
  Top 0.406: M2A.11 126.59,20.53 | 129.62,27.15 IC4.11
  Top 1.016: 126.59,20.53 127.79,21.74 127.79,25.32 129.62,27.15
VMB1
  Top 0.406: M1A.11 126.59,66.57 | 129.62,73.18 IC5.11
  Top 1.016: 126.59,66.57 127.79,67.78 127.79,71.36 129.62,73.18
VPIC
  Top 0.61: IC2.1 15.24,18.89 D2.C 15.72,14.29 17.78,12.22 17.78,3.17 15.88,1.27 3.33,1.27 1.75,2.86 1.75,12.54 R18.2
  Bottom 0.61: ICSP.2 3.26,21.18 5.08,19.37 R18.2 | C17.1 D2.C
VUSB
  Top 0.61: IC2.17 C13.2

## Text on the board
Top: Complete | Kit PCB
tNames: Thomas Carpenter (2012) | GND | 3v3 | BRef | !Rst | ARef | !Slp | VMB | !Err | B1 | 12v (4A Max) | Dcy | IsB | Dir | B2 | !EN | A2 | Stp | IsA | A1 | S0 | VMA | A1 | S1 | VCP | S2 | A2 | CP2 | !Home | CP1 | B2 | GND | B1 | A1 | A2 | GND | 3v3 | B2 | BRef | !Rst | B1 | ARef | !Slp | VMB | !Err | B1 | Dcy | IsB | Dir | B2 | !EN | Stp | A2 | IsA | A1 | S0 | V3.0-Kit | VMA | S1 | AstroEQ | VCP | S2 | CP2 | Controller | !Home | CP1 | GND